# Altium PCB OSSI-1 Battery Board.PcbDoc
Units mil, origin at the board's own origin, x right, y up, seen from the top; angles counter-clockwise.
Board outline 3701 x 3465 mil, 2 copper layers (Top, Bottom), stack 61.811 mil thick; 20 components, 47 nets, 76 pads, 1 vias.
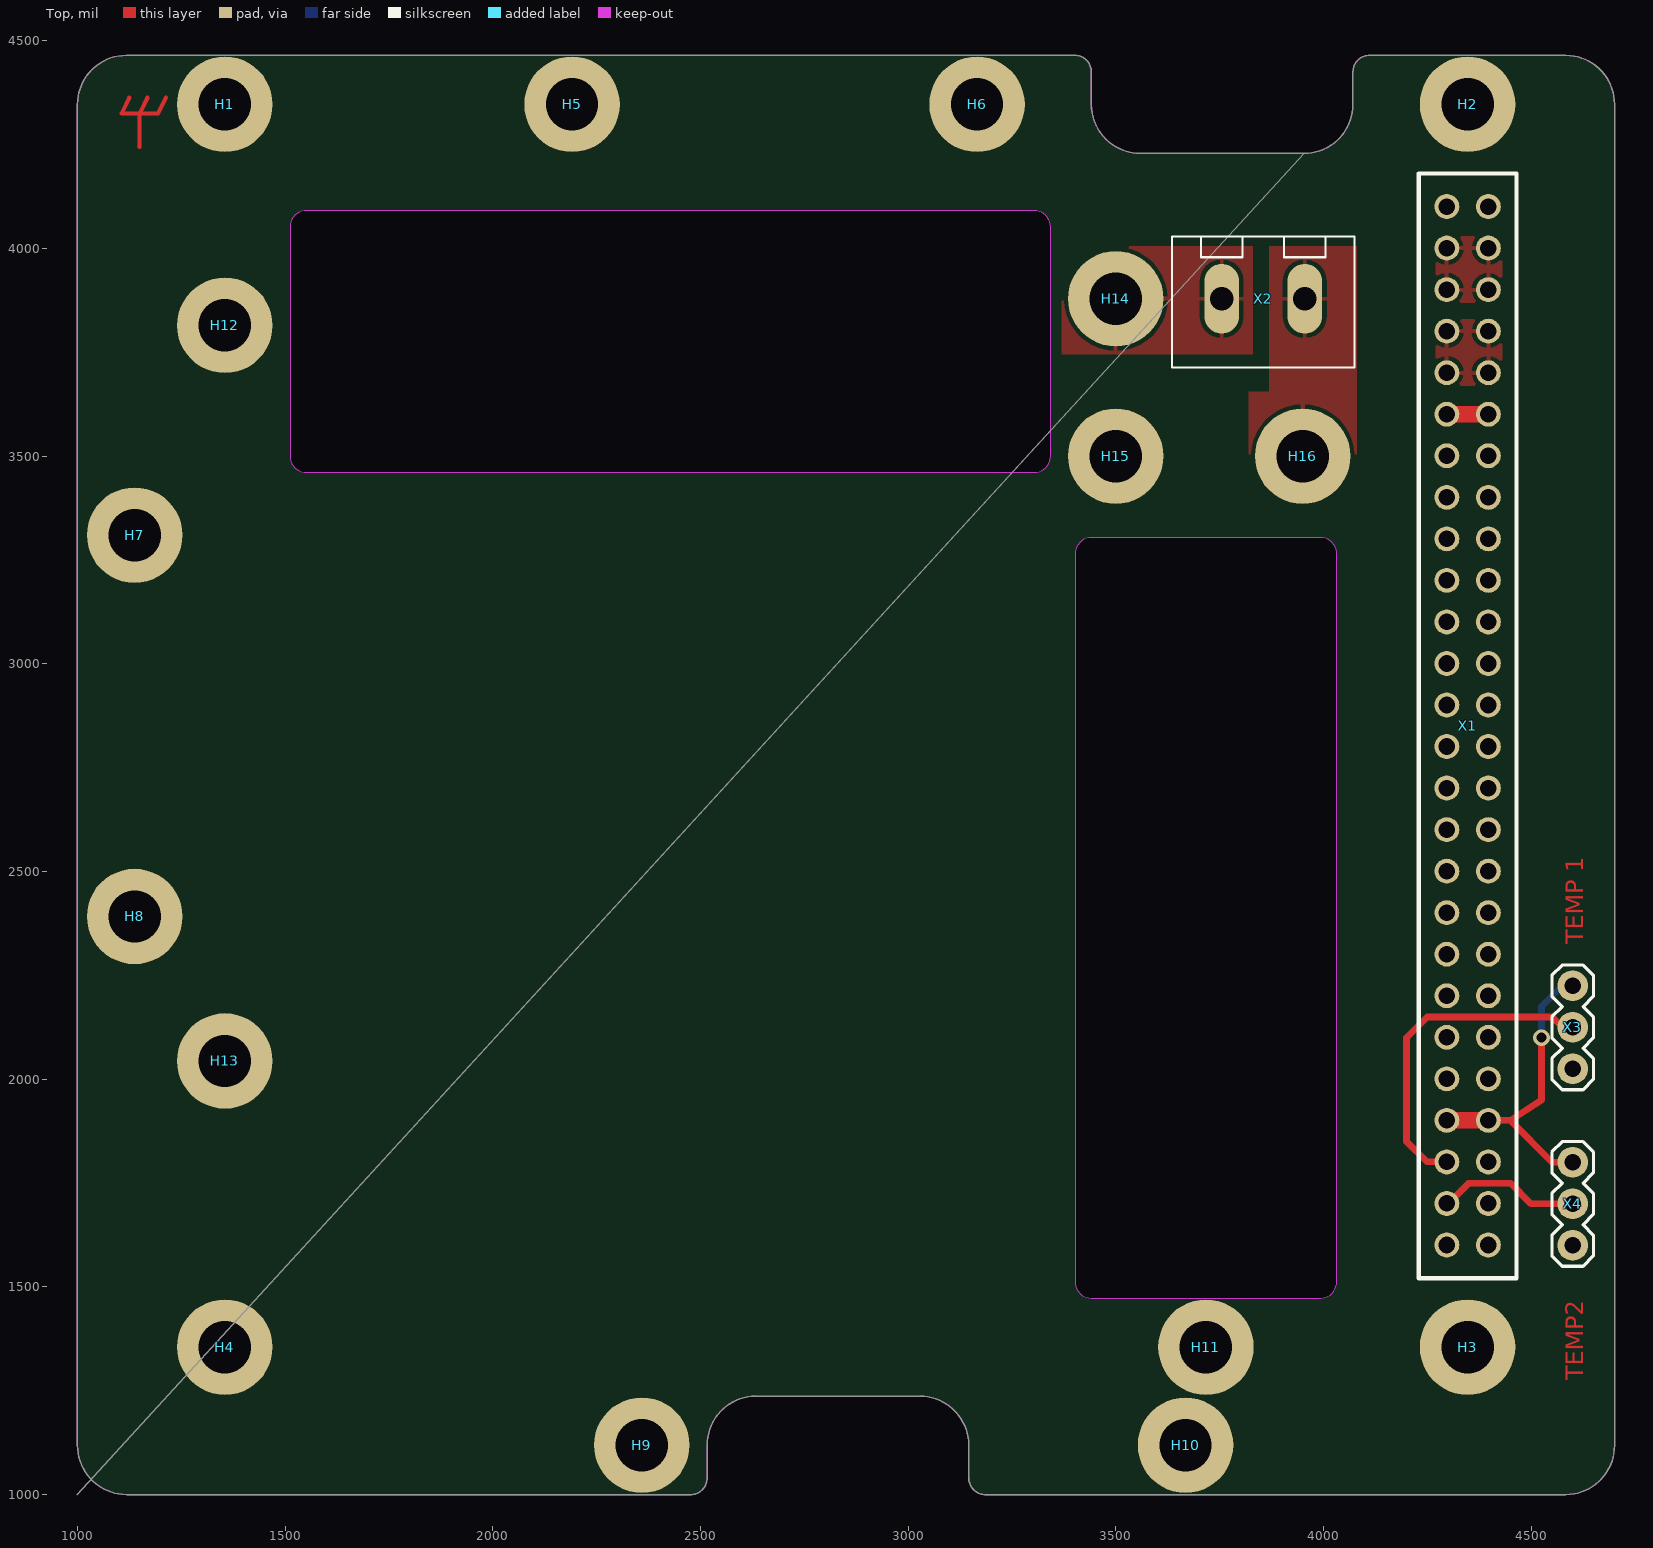
[diagram p0: Top view]
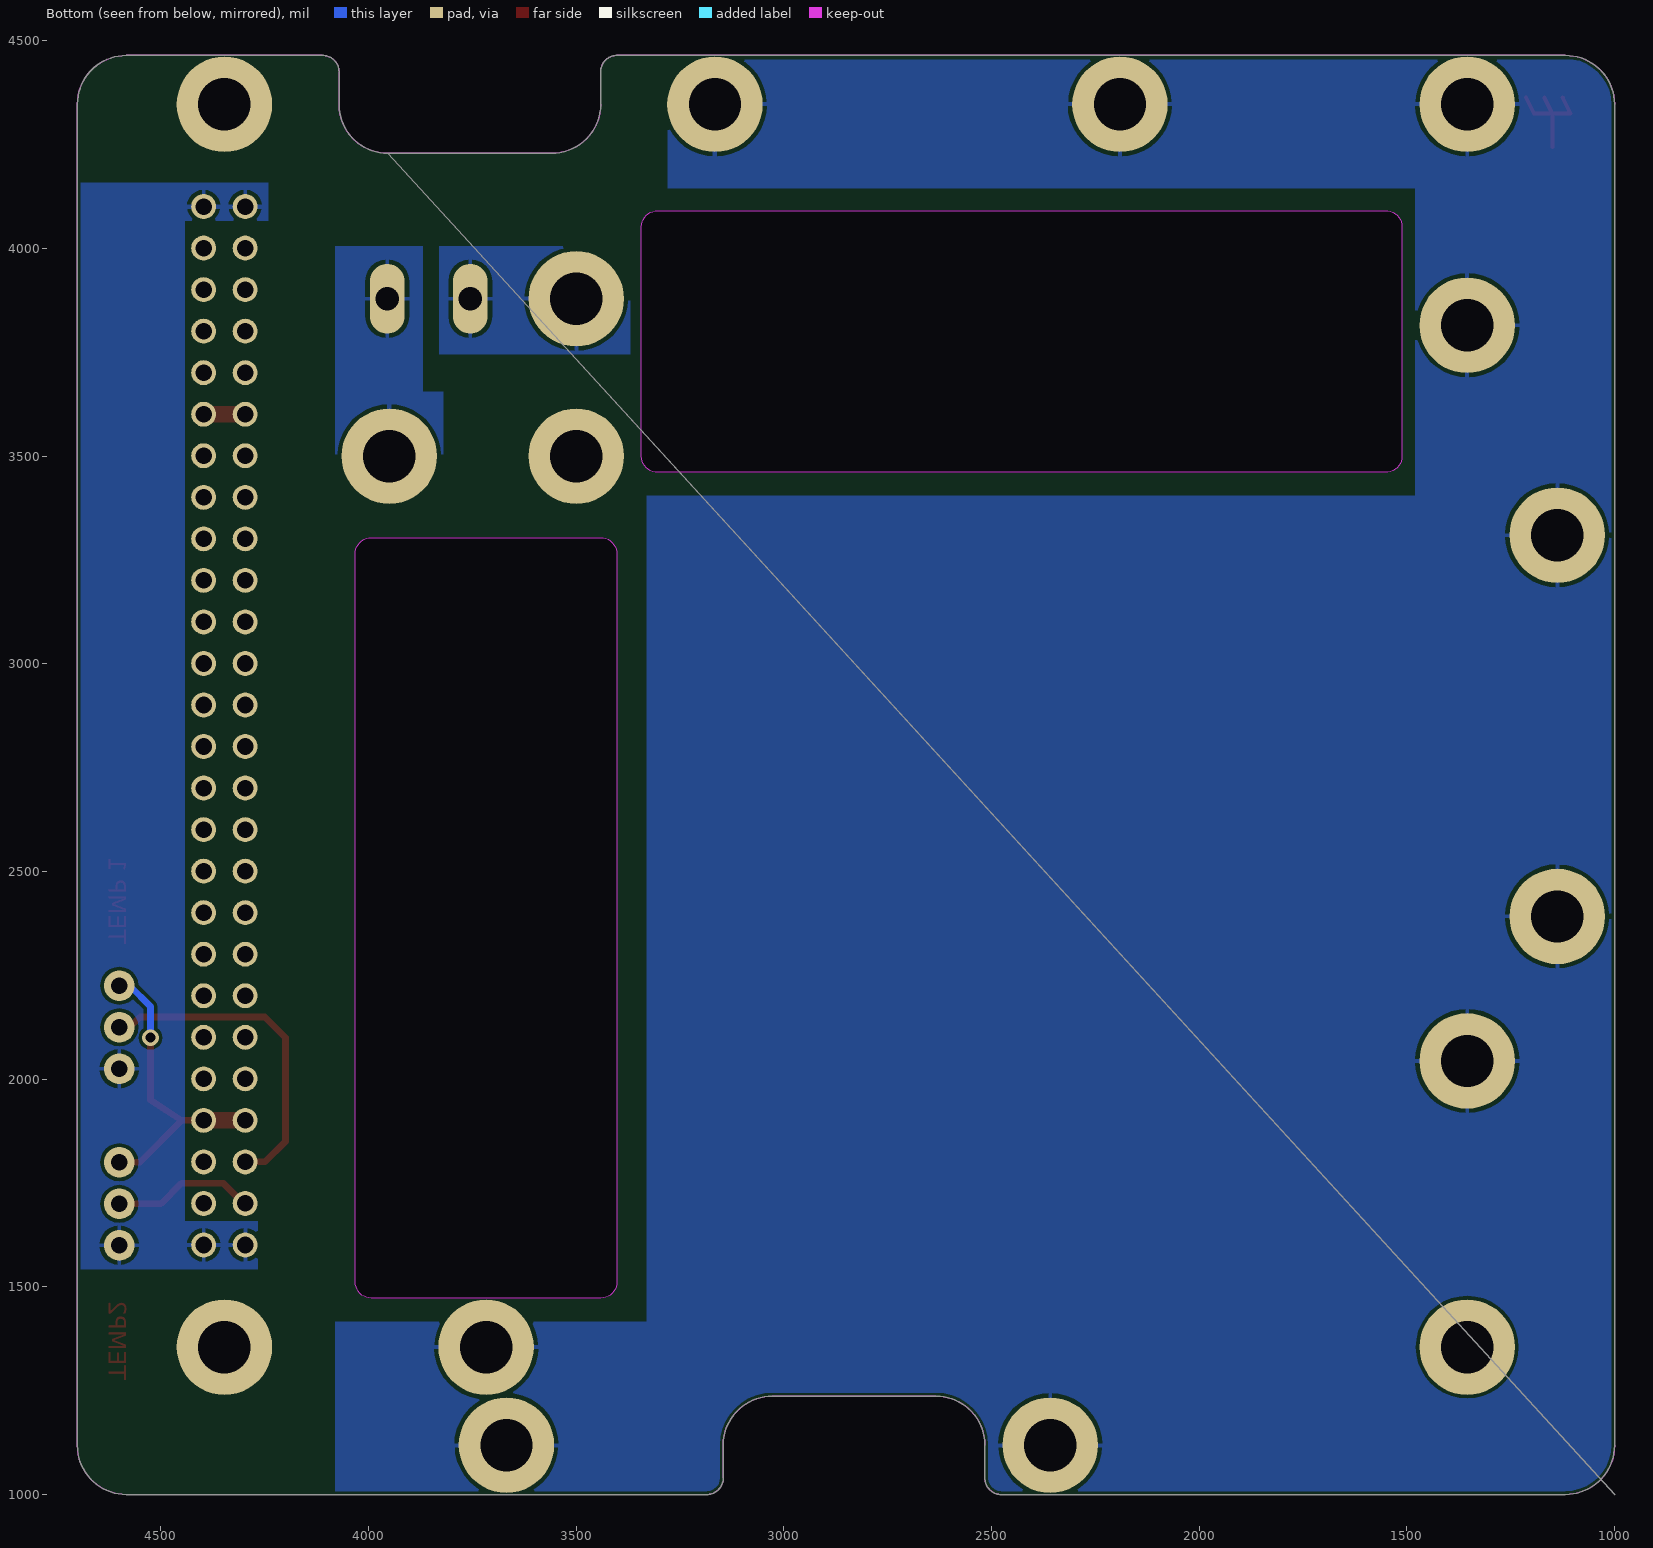
[diagram p1: Bottom view, seen from below]

## Layer stack, top to bottom
Top Solder: solder mask 0.4, Solder Resist, Dk 3.5
Top: signal copper 1.378
Dielectric 1: core 59.0551, FR-4, Dk 4.8
Bottom: signal copper 1.378
Bottom Solder: solder mask 0.4, Solder Resist, Dk 3.5

## Board outline
3953,4229 3560,4229 cw(c3559.5,4347.5) 3441,4347 3441,4426 ccw(c3402,4426) 3402,4465 1119,4465 ccw(c1118.5,4346.5) 1000,4347 1000,1119 ccw(c1119,1119) 1119,1000 2477,1000 ccw(c2476.5,1039.5) 2516,1040 2516,1119 cw(c2634,1119) 2634,1237 3028,1237 cw(c3028,1119) 3146,1119 3146,1040 ccw(c3186,1040) 3186,1000 4583,1000 ccw(c4582.5,1118.5) 4701,1119 4701,4347 ccw(c4583,4347) 4583,4465 4111,4465 ccw(c4110.5,4425.5) 4071,4426 4071,4347 cw(c3953,4347) 1000,1000
cut-out: 1552,3461 3304,3461 ccw(c3304,3500) 3343,3500 3343,4052 ccw(c3304,4052) 3304,4091 1552,4091 ccw(c1551.5,4051.5) 1512,4052 1512,3500 ccw(c1551.5,3500.5)
cut-out: 3402,3264 3402,1512 ccw(c3441,1512) 3441,1473 3993,1473 ccw(c3993,1512) 4032,1512 4032,3264 ccw(c3992.5,3264.5) 3993,3304 3441,3304 ccw(c3441.5,3264.5)

## Design rules (kind name [scope] priority, off if disabled: settings)
Clearance mdViaVia [IsVia vs IsVia] p1: gap=8
Clearance mdPadVia [IsPad vs IsVia] p2: gap=8
Clearance mdPadPad [IsPad vs IsPad] p3: gap=8
Clearance mdWireVia [(InLayerClass('Signal Layers') AND IsTrack) vs IsVia] p4: gap=8
Clearance mdWirePad [(InLayerClass('Signal Layers') AND IsTrack) vs IsPad] p5: gap=8
Clearance mdWireWire [(InLayerClass('Signal Layers') AND IsTrack) vs (InLayerClass('Signal Layers') AND IsTrack)] p6: gap=8
Clearance [All] p7: gap=8
HoleSize [All] p1: absolutevalues=TRUE maxlimit=100000 minlimit=24 maxpercent=80.000 minpercent=20.000
HoleToHoleClearance [All] p1: gap=8 allowstackedmicrovias=TRUE
PolygonConnect ThermalVias [IsVia] p1: connectstyle=Direct reliefconductorwidth=10 reliefentries=4 polygonreliefangle="90 Angle" airgapwidth=10
PolygonConnect [All] p2: connectstyle=Relief reliefconductorwidth=10 reliefentries=4 polygonreliefangle="90 Angle" airgapwidth=10
RoutingVias [All] p1: holewidth=28 width=50 viastyle="Through Hole" minholewidth=28 minwidth=50 maxholewidth=28 maxwidth=50
SilkToSilkClearance [All] p1 off: silktosilkclearance=10
SilkToSolderMaskClearance [IsPad] p1 off: minsilkscreentomaskgap=10 clearancetoexposedcopper=TRUE
SolderMaskExpansion [All] p1: expansion=4
Width [All] p1: maxlimit=100000 minlimit=10 preferedwidth=10
26 further rules are at their usual default settings.

## Components (designator, comment, footprint, x,y, rotation, side; value= is the part's Value field where it differs from the comment)
H1 "" 3.2-PAD-ROUND 1355,4347 r0 top
H2 "" 3.2-PAD-ROUND 4347,4347 r0 top
H3 "" 3.2-PAD-ROUND 4347,1355 r0 top
H4 "" 3.2-PAD-ROUND 1355,1355 r0 top
H5 "" 3.2-PAD-ROUND 2191,4347 r0 top
H6 "" 3.2-PAD-ROUND 3166,4347 r0 top
H7 "" 3.2-PAD-ROUND 1138,3310 r0 top
H8 "" 3.2-PAD-ROUND 1138,2392 r0 top
H9 "" 3.2-PAD-ROUND 2359,1119 r0 top
H10 "" 3.2-PAD-ROUND 3668,1119 r0 top
H11 "" 3.2-PAD-ROUND 3717,1355 r0 top
H12 "" 3.2-PAD-ROUND 1355,3815 r0 top
H13 "" 3.2-PAD-ROUND 1355,2044 r0 top
H14 "" 3.2-PAD-ROUND 3500,3879 r0 top
H15 "" 3.2-PAD-ROUND 3500,3500 r0 top
H16 "" 3.2-PAD-ROUND 3950,3500 r0 top
X1 "" ESQ-126-XX-X-D 4347,2851 r0 top
X2 "" WEIDMULLER1760490000 3855,3879 r0 top
X3 "" 1X03 4600,2225 r270 top
X4 "" 1X03 4600,1800 r270 top

## Footprints (in the part's own frame and the unit in brackets; to place one, negate y for a bottom-side part, rotate by r counter-clockwise, add the part's x,y. Pads: shape width x height; smd on the part's side, far side on the other; paste and mask are expansions set on the pad)
1X03 [mil] "1X03"
  round 74 hole 40: 1(0,0) 2(100,0) 3(200,0)
  silkscreen extent -50,-50 250,50
3.2-PAD-ROUND [mil] "3.2-PAD-ROUND"
  round 230 hole 126: B3,2(0,0)
ESQ-126-XX-X-D [mil] "ESQ-126-XX-X-D"
  round 60 hole 40: 1(-50,1250) 2(50,1250) 3(-50,1150) 4(50,1150) 5(-50,1050) 6(50,1050) 7(-50,950) 8(50,950) 9(-50,850) 10(50,850) 11(-50,750) 12(50,750) 13(-50,650) 14(50,650) 15(-50,550) 16(50,550) 17(-50,450) 18(50,450) 19(-50,350) 20(50,350) 21(-50,250) 22(50,250) 23(-50,150) 24(50,150) 25(-50,50) 26(50,50) 27(-50,-50) 28(50,-50) 29(-50,-150) 30(50,-150) 31(-50,-250) 32(50,-250) 33(-50,-350) 34(50,-350) 35(-50,-450) 36(50,-450) 37(-50,-550) 38(50,-550) 39(-50,-650) 40(50,-650) 41(-50,-750) 42(50,-750) 43(-50,-850) 44(50,-850) 45(-50,-950) 46(50,-950) 47(-50,-1050) 48(50,-1050) 49(-50,-1150) 50(50,-1150) 51(-50,-1250) 52(50,-1250)
  silkscreen extent -117,-1330 118,1330
WEIDMULLER1760490000 [mil] "WEIDMULLER1760490000"
  oval 84x168 hole 56: 1(100,0) 2(-100,0)
  silkscreen extent -220,-165 220,150

## Part data
H1 H2 H3 H4 H5 H6 H7 H8 H9 H10 H11 H12 H13 H14 H15 H16: library part 3.2-PAD-ROUND
X1: library part ESQ-126-XX-X-D
X2: library part WEIDMULLER1760490000
X3 X4: library part 1X03

## Via types
v1: diameter 40/40 (per signal layer), hole 24, Top to Bottom, 1 vias

## Nets (pads, with @x,y where several pads share a name; then routed paths per layer and width w, separated by ;. In a path a pad name is that pad's centre, name@x,y a point inside that pad or via, vN(x,y) a via of type N, cw(c..) or ccw(c..) an arc to the next point about the centre after c; other vN are vias at no path point)
3.3VOBC: X1.45 X1.46 X3.1 X4.1 | length 755.6
  Top w16: X1.46 4450,1901 ; v1(4525,2100) 4525,1950 4451,1901 4450,1901 ; X4.1 4550,1800 4450,1901
  Top w40: X1.45 X1.46
  Bottom w16: v1(4525,2100) 4525,2175 4575,2225 X3.1
ANT_DEPLOY1: X1.19
ANT_DEPLOY2: X1.20
BAT_-CHRG: X1.42
BAT_-FAULT: X1.44
BAT_-ON: X1.38
BAT_TEMP: X1.47 X3.2 | length 798.1
  Top w16: X1.47 4250,1801 4200,1850 4200,2100 4250,2150 4550,2150 4575,2125 X3.2
BEACON_-FAULT: X1.30
BEACON_OFF: X1.24
BEACON_SCL: X1.37
BEACON_SDA: X1.39
BUS_CS: X1.27
COMMS_-FAULT: X1.32
COMMS_OFF: X1.25
COMMS_SCL: X1.41
COMMS_SDA: X1.43
GND: X1.1 X1.2 X1.51 X1.52 X3.3 X4.3
LED_-FAULT: X1.28
LED_OFF: X1.23
LED_SCL: X1.33
LED_SDA: X1.35
N$1: H14.B3,2 X2.2
N$2: H16.B3,2 X2.1
N$56: 
N$58:  | length 75
  Top w10: 1150,4244 1150,4319
N$59:  | length 214
  Top w10: 1125,4363 1107,4325 1150,4325 ; 1169,4363 1150,4325 ; 1213,4363 1194,4325 1150,4325
OBC_-FAULT: X1.34
OBC_OFF: X1.26
PANELTEMP_SCL: X1.29
PANELTEMP_SDA: X1.31
SC_-ON: X1.40
SC_-PFO: X1.48
SCCHG_EN: X1.21
SCOUT_-PG: X1.50
SCOUT_EN: X1.22
SOLAR_-ON: X1.36
SOLAR_CS1: X1.15
SOLAR_CS2: X1.14
SOLAR_CS3: X1.17
SOLAR_CS4: X1.16
SOLAR_CS5: X1.18
STRUT_GND: H1.B3,2 H5.B3,2 H6.B3,2 H7.B3,2 H8.B3,2 H9.B3,2 H10.B3,2 H11.B3,2 H12.B3,2 H13.B3,2
SUPERCAP_TEMP: X1.49 X4.2 | length 344
  Top w16: X1.49 4301,1701 4350,1750 4450,1750 4500,1700 X4.2
VBAT: X1.11 X1.12 | length 100
  Top w40: X1.11 X1.12
VBUS: X1.7 X1.8 X1.9 X1.10
VSOLAR: X1.3 X1.4 X1.5 X1.6
VSUPERCAP: X1.13
pads on no net: H2.B3,2 H3.B3,2 H4.B3,2 H15.B3,2

## Polygon pours and split planes (outlines as drawn)
VSOLAR on Top "Top-VSOLAR" (solid, remove dead copper, pour order 2): 4270,4030 4430,4030 4430,3870 4270,3870
VBUS on Top "Top-VBUS" (solid, remove dead copper, pour order 6): 4270,3830 4430,3830 4430,3670 4270,3670
N$1 on Top "Top-N$1" (solid, remove dead copper, pour order 12): 3370,3745 3830,3745 3830,4005 3370,4005
N$2 on Top "Top-N$2" (solid, remove dead copper, pour order 16): 3870,4005 3870,3655 3820,3655 3820,3370 4080,3370 4080,4005
GND on Bottom "Bottom-GND" (solid, remove dead copper, pour order 4): 4267,1658 4267,1542 4708,1542 4708,4158 4242,4158 4242,4067 4442,4067 4442,1658
STRUT_GND on Bottom "Bottom-STRUT_GND" (solid, remove dead copper, pour order 8): 3280,4455 3280,4145 1480,4145 1480,3405 3330,3405 3330,1416 4080,1416 4080,995 995,995 995,4455
N$1 on Bottom "Bottom-N$1" (solid, remove dead copper, pour order 10): 3370,3745 3830,3745 3830,4005 3370,4005
N$2 on Bottom "Bottom-N$2" (solid, remove dead copper, pour order 14): 3870,4005 3870,3655 3820,3655 3820,3370 4080,3370 4080,4005

## Keep-outs
Keep-Out Layer:
  lines w0: 1000,1119 ccw(c1119,1119) 1119,1000 2477,1000 ccw(c2476.5,1039.5) 2516,1040 2516,1119 cw(c2634,1119) 2634,1237 3028,1237 cw(c3028,1119) 3146,1119 3146,1040 ccw(c3186,1040) 3186,1000 4583,1000 ccw(c4582.5,1118.5) 4701,1119 4701,4347 ccw(c4583,4347) 4583,4465 4111,4465 ccw(c4110.5,4425.5) 4071,4426 4071,4347 cw(c3953,4347) 3953,4229 3560,4229 cw(c3559.5,4347.5) 3441,4347 3441,4426 ccw(c3402,4426) 3402,4465 1119,4465 ccw(c1118.5,4346.5) 1000,4347 1000,1119

## Other copper
Top:
  text "TEMP 1" at 4625,2325 h42.5 r90
  text "TEMP2" at 4625,1275 h42.5 r90
Bottom:
  pour cut-out net N$56: 1000,1000 1010,1000 1010,1010 1000,1010

## Silkscreen, mask and mechanical layers (free items; w line width, h text height)
Top Solder:
  text "TEMP 1" at 4625,2325 h42.5 r90
  text "TEMP2" at 4625,1275 h42.5 r90
Dimension:
  lines w0: 1000,1119 ccw(c1119,1119) 1119,1000 2477,1000 ccw(c2476.5,1039.5) 2516,1040 2516,1119 cw(c2634,1119) 2634,1237 3028,1237 cw(c3028,1119) 3146,1119 3146,1040 ccw(c3186,1040) 3186,1000 4583,1000 ccw(c4582.5,1118.5) 4701,1119 4701,4347 ccw(c4583,4347) 4583,4465 4111,4465 ccw(c4110.5,4425.5) 4071,4426 4071,4347 cw(c3953,4347) 3953,4229 3560,4229 cw(c3559.5,4347.5) 3441,4347 3441,4426 ccw(c3402,4426) 3402,4465 1119,4465 ccw(c1118.5,4346.5) 1000,4347 1000,1119 ; 1512,3500 ccw(c1551.5,3500.5) 1552,3461 3304,3461 ccw(c3304,3500) 3343,3500 3343,4052 ccw(c3304,4052) 3304,4091 1552,4091 ccw(c1551.5,4051.5) 1512,4052 1512,3500 ; 3402,1512 ccw(c3441,1512) 3441,1473 3993,1473 ccw(c3993,1512) 4032,1512 4032,3264 ccw(c3992.5,3264.5) 3993,3304 3441,3304 ccw(c3441.5,3264.5) 3402,3264 3402,1512

## Text inside footprints (layer, text, board x,y; h text height)
X1: tNames ">NAME" at 4172,4301 h108.5; tValues ">VALUE" at 4172,4226 h108.5
X2: tNames ">NAME" at 3555,3779 h77.5 r90; tValues ">VALUE" at 3630,3754 h77.5 r90
X3: tNames ">NAME" at 4672,2278 h77.5 r270; tValues ">VALUE" at 4475,2275 h77.5 r270
X4: tNames ">NAME" at 4672,1853 h77.5 r270; tValues ">VALUE" at 4475,1850 h77.5 r270